# Altium PCB ATMEGA8-ATMEGA16(贴片).PcbDoc
Units mil, origin at the board's own origin, x right, y up, seen from the top; angles counter-clockwise.
Board outline 6000 x 4000 mil, 2 copper layers (Top Layer, Bottom Layer); 2 components, 39 nets, 72 pads, 17 vias.
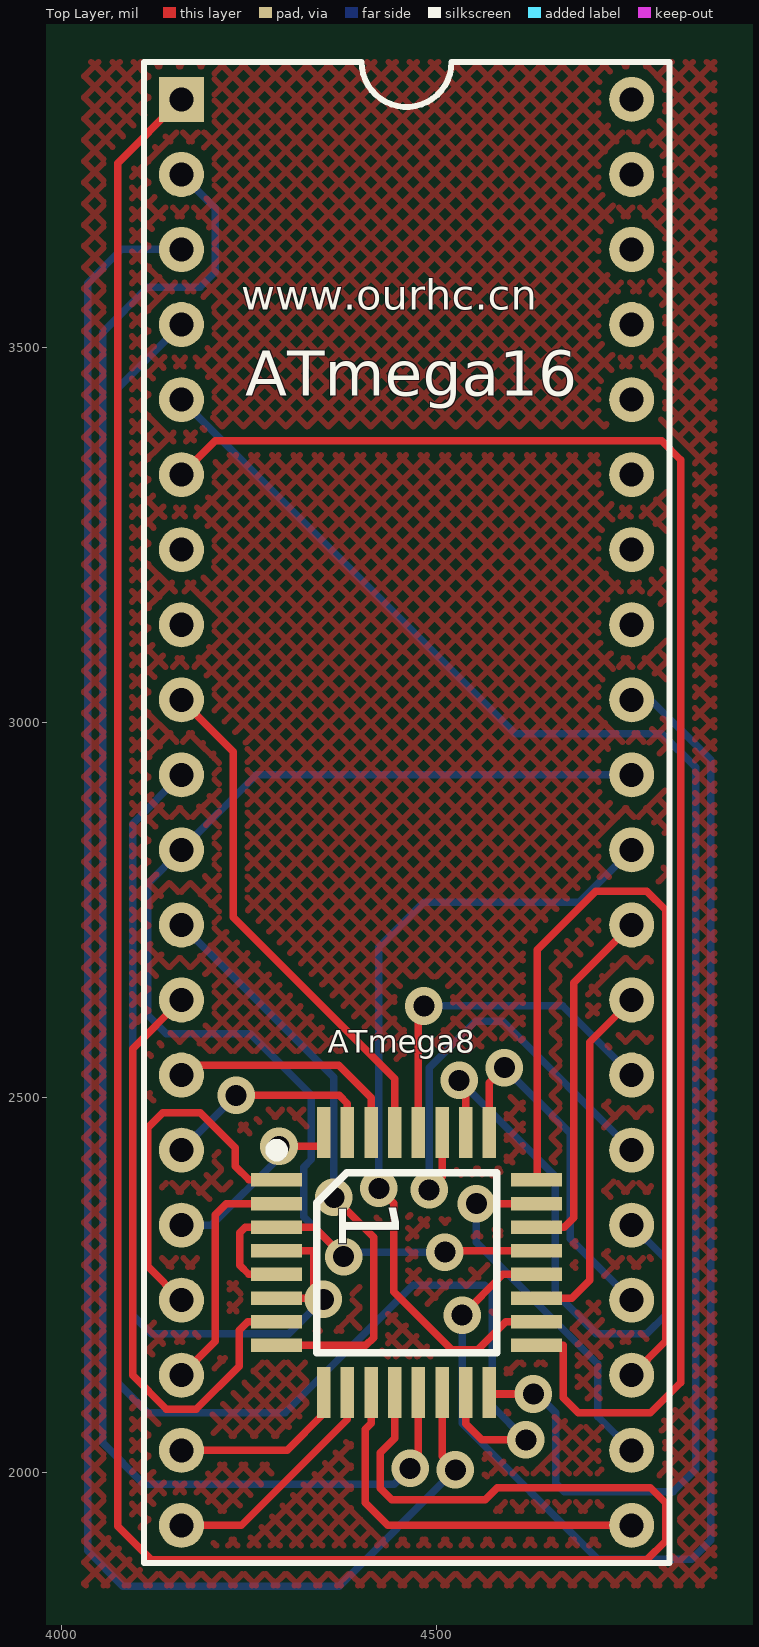
[diagram p0: Top Layer view]
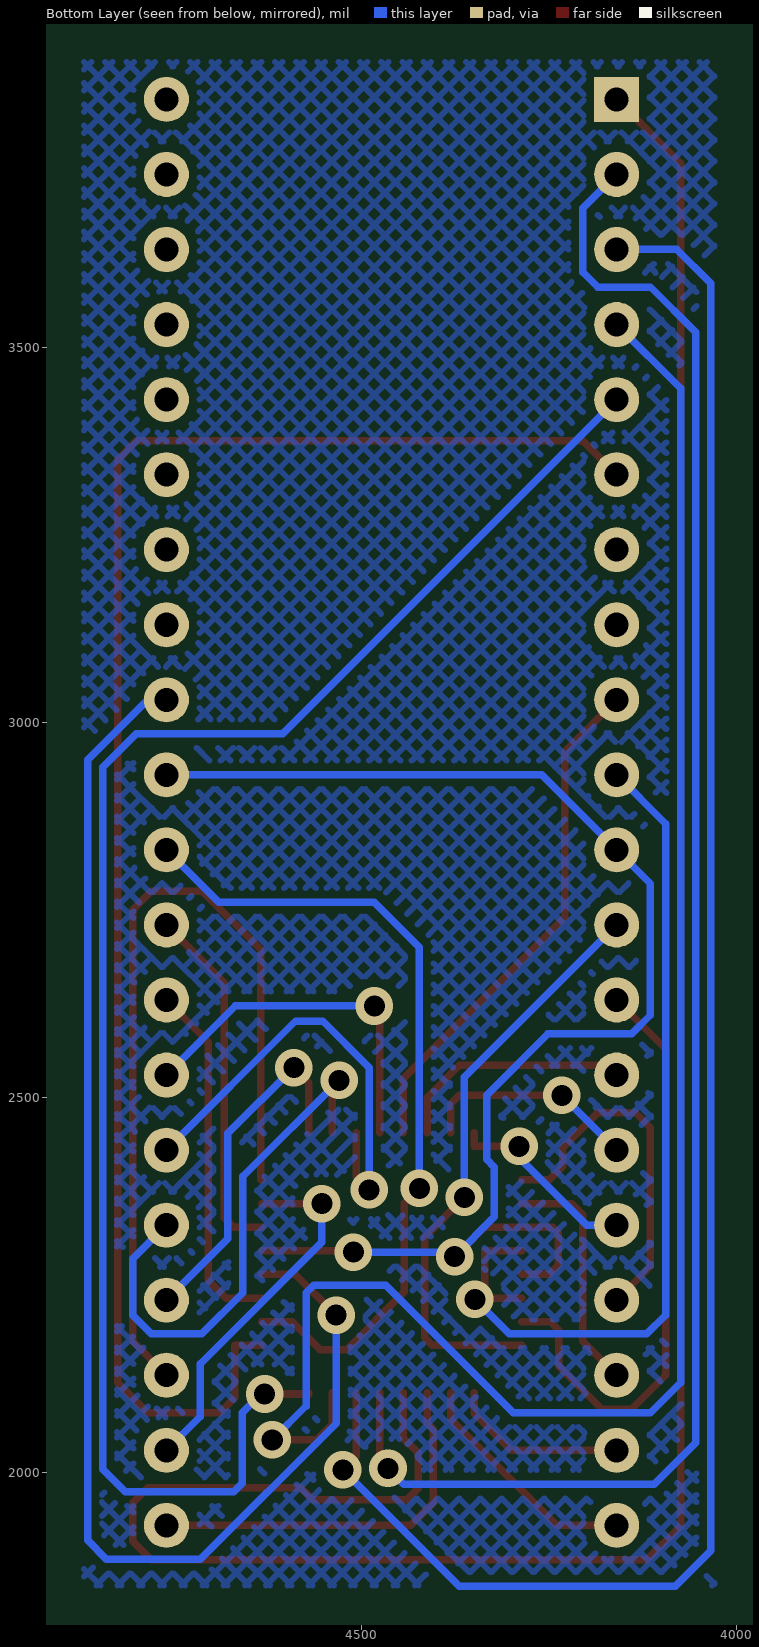
[diagram p1: Bottom Layer view, seen from below]

## Layer stack, top to bottom
Top Layer: signal copper 1.4
Dielectric: dielectric 12.6, FR-4, Dk 4.8
Bottom Layer: signal copper 1.4

## Board outline
1000,1000 7000,1000 7000,5000 1000,5000

## Design rules (kind name [scope] priority, off if disabled: settings)
Clearance [All] p1: gap=10
ComponentClearance [All] p1: gap=10 collisioncheckmode=3 verticalgap=10
PolygonConnect [All] p1: connectstyle=Relief reliefconductorwidth=10 reliefentries=4 polygonreliefangle="90 Angle"
RoutingVias [All] p1: holewidth=28 width=50 viastyle="Through Hole" minholewidth=28 minwidth=50 maxholewidth=28 maxwidth=50
SolderMaskExpansion [All] p1: expansion=4
TestPointUsage [All] p1: valid=0 allowmultiple=FALSE
Testpoint [All] p1: side=15 testpointundercomponent=TRUE minsize=40 maxsize=100 preferedsize=60 minholesize=0 maxholesize=40 preferedholesize=32 testpointgrid=1 style=1023 order=0123456789
Width [All] p1: maxlimit=10 minlimit=10 preferedwidth=10
17 further rules are at their usual default settings.

## Components (designator, comment, footprint, x,y, rotation, side; value= is the part's Value field where it differs from the comment)
ATmega8 "ATmega8-16AI" TQFP-32_0.8/7×7mm 4460,2280 r0 top
ATmega16 "ATmega16-16PI" 底座DIP-40/引脚15.24mm 4460,2880 r270 top (schematic designator ATmega16-)

## Footprints (in the part's own frame and the unit in brackets; to place one, negate y for a bottom-side part, rotate by r counter-clockwise, add the part's x,y. Pads: shape width x height; smd on the part's side, far side on the other; paste and mask are expansions set on the pad)
TQFP-32_0.8/7×7mm [mil] "引脚间距：0.8mm，长度 ：1mm 。主体外形 7×7mm，方形，边角索引"
  rect 68x18 smd: 1(-173.23,110.24) 2(-173.23,78.74) 3(-173.23,47.24) 4(-173.23,15.75) 5(-173.23,-15.75) 6(-173.23,-47.24) 7(-173.23,-78.74) 8(-173.23,-110.24) 17(173.23,-110.24) 18(173.23,-78.74) 19(173.23,-47.24) 20(173.23,-15.75) 21(173.23,15.75) 22(173.23,47.24) 23(173.23,78.74) 24(173.23,110.24)
  rect 18x68 smd: 9(-110.24,-173.23) 10(-78.74,-173.23) 11(-47.24,-173.23) 12(-15.75,-173.23) 13(15.75,-173.23) 14(47.24,-173.23) 15(78.74,-173.23) 16(110.24,-173.23) 25(110.24,173.23) 26(78.74,173.23) 27(47.24,173.23) 28(15.75,173.23) 29(-15.75,173.23) 30(-47.24,173.23) 31(-78.74,173.23) 32(-110.24,173.23)
  silkscreen extent -178,-120 120,155
底座DIP-40/引脚15.24mm [mil] "引脚跨度 ：600 Mil ，主体外形 17.8×50.8mm（700×2000Mil）"
  rect 60x60 hole 32: 1(-950,-300)
  round 60 hole 32: 2(-850,-300) 3(-750,-300) 4(-650,-300) 5(-550,-300) 6(-450,-300) 7(-350,-300) 8(-250,-300) 9(-150,-300) 10(-50,-300) 11(50,-300) 12(150,-300) 13(250,-300) 14(350,-300) 15(450,-300) 16(550,-300) 17(650,-300) 18(750,-300) 19(850,-300) 20(950,-300) 21(950,300) 22(850,300) 23(750,300) 24(650,300) 25(550,300) 26(450,300) 27(350,300) 28(250,300) 29(150,300) 30(50,300) 31(-50,300) 32(-150,300) 33(-250,300) 34(-350,300) 35(-450,300) 36(-550,300) 37(-650,300) 38(-750,300) 39(-850,300) 40(-950,300)
  silkscreen extent -1000,-350 1000,350

## Part data
ATmega8: library part ATmega8-A, "8 位微处理器/32引脚"
ATmega16: library part ATmega16-P, "8 位微处理器/40引脚"

## Via types
v1: diameter 50, hole 28, Top Layer to Bottom Layer, 17 vias

## Nets (pads, with @x,y where several pads share a name; then routed paths per layer and width w, separated by ;. In a path a pad name is that pad's centre, name@x,y a point inside that pad or via, vN(x,y) a via of type N, cw(c..) or ccw(c..) an arc to the next point about the centre after c; other vN are vias at no path point)
AREF: ATmega8.20 ATmega16.32 | length 1860.3
  Top Layer w10: v1(4534,2210) 4588.25,2264.25 ATmega8.20
  Bottom Layer w10: v1(4534,2210) 4534,2065.7 4714.7,1885 4840,1885 4865,1910 4865,2950 4785,3030 ATmega16.32
AVCC: ATmega8.18 ATmega16.30 | length 1095.7
  Top Layer w10: v1(4423,2379) 4443,2359 4443,2241 4520,2164 4555,2164 4592.26,2201.26 ATmega8.18
  Bottom Layer w10: v1(4423,2379) 4423,2700 4483,2760 4690,2760 ATmega16.30
GND: ATmega8.3 ATmega8.5 ATmega8.21 ATmega16.11 ATmega16.31 | length 1903
  Top Layer w10: ATmega8.5 4250,2264.25 4237.77,2276.48 4237.77,2319.7 4245.31,2327.24 ATmega8.3 4336.76,2327.24 v1(4376,2288) ; v1(4510.99,2294.12) 4512.62,2295.75 ATmega8.21
  Bottom Layer w10: v1(4510.99,2294.12) 4376,2294.12 v1(4376,2288) 4323,2341 4323,2407.24 4333.29,2417.53 4333.29,2503.29 4251.57,2585 4140,2585 4115,2610 4115,2785 ATmega16.11 4260,2930 ATmega16.31
PA0: ATmega16.40
PA1: ATmega16.39
PA2: ATmega16.38
PA3: ATmega16.37
PA4: ATmega16.36
PA5: ATmega16.35
PA6: ATmega16.34
PA7: ATmega16.33
PB0: ATmega8.12 ATmega16.1 | length 3283.3
  Top Layer w10: ATmega16.1 4075,3745 4075,1929 4120,1884 4780,1884 4805,1909 4805,1960 4785,1980 4580.75,1980 4564.75,1964 4440,1964 4424.75,1979.25 4424.75,2026.5 4444.25,2046 ATmega8.12
PB1: ATmega8.13 ATmega16.2 | length 2358.3
  Top Layer w10: v1(4464.75,2006) 4475.75,2017 ATmega8.13
  Bottom Layer w10: ATmega16.2 4205,3685 4205,3600 4185,3580 4115,3580 4055,3520 4055,2040 4110,1985 4443.75,1985 v1(4464.75,2006)
PB2: ATmega8.14 ATmega16.3 | length 2516.4
  Top Layer w10: ATmega8.14 4507.24,2021.76 v1(4525,2004)
  Bottom Layer w10: ATmega16.3 4080,3630 4035,3585 4035,1896 4082,1849 4370,1849 v1(4525,2004)
PB3: ATmega8.15 ATmega16.4 | length 2380.6
  Top Layer w10: ATmega8.15 4538.74,2065.26 4560,2044 v1(4619,2044)
  Bottom Layer w10: ATmega16.4 4075,3445 4075,2120 4115,2080 4298,2080 4468,2250 4564,2250 4574,2240 4574,2089 v1(4619,2044)
PB4: ATmega8.16 ATmega16.5 | length 2220.8
  Top Layer w10: ATmega8.16 4570.24,2105 v1(4629,2105)
  Bottom Layer w10: ATmega16.5 4605,2985 4800,2985 4845,2940 4845,2005 4815,1975 4670,1975 4659,1986 4659,2080 4634,2105 v1(4629,2105)
PB5: ATmega8.17 ATmega16.6 | length 2210.4
  Top Layer w10: ATmega16.6 4205,3375 4800,3375 4825,3350 4825,2120 4785,2080 4689,2080 4669,2100 4669,2169.76 ATmega8.17
PB6: ATmega16.7
PB7: ATmega16.8
PC0: ATmega8.23 ATmega16.22 | length 494.7
  Top Layer w10: v1(4553,2358.74) ATmega8.23
  Bottom Layer w10: v1(4553,2358.74) 4553,2307 4715,2145 4715,2075 ATmega16.22
PC1: ATmega8.24 ATmega16.23 | length 1159.8
  Top Layer w10: ATmega8.24 4634,2390.24 4634,2697 4712,2775 4780,2775 4805,2750 4805,2175 ATmega16.23
PC2: ATmega8.25 ATmega16.24 | length 475.4
  Top Layer w10: ATmega8.25 4570.24,2520 v1(4590.24,2540)
  Bottom Layer w10: v1(4590.24,2540) 4678,2452.24 4678,2312 ATmega16.24
PC3: ATmega8.26 ATmega16.25 | length 728.2
  Top Layer w10: v1(4530,2523) 4538.74,2514.26 ATmega8.26
  Bottom Layer w10: v1(4530,2523) 4658,2395 4658,2240 4713,2185 4780,2185 4805,2210 4805,2285 ATmega16.25
PC4: ATmega8.27 ATmega16.26 | length 613.3
  Top Layer w10: v1(4490,2377) 4507.24,2394.24 ATmega8.27
  Bottom Layer w10: v1(4490,2377) 4490,2540 4552,2602 4588,2602 ATmega16.26
PC5: ATmega8.28 ATmega16.27 | length 486.9
  Top Layer w10: ATmega8.28 4475.75,2614.75 v1(4483,2622)
  Bottom Layer w10: v1(4483,2622) 4668,2622 ATmega16.27
PC6: ATmega8.19 ATmega16.28 | length 477.2
  Top Layer w10: ATmega8.19 4680,2232.76 4704,2256.76 4704,2574 ATmega16.28
PC7: ATmega8.22 ATmega16.29 | length 477
  Top Layer w10: ATmega8.22 4670.24,2327.24 4683,2340 4683,2653 ATmega16.29
PD0: ATmega8.30 ATmega16.14 | length 322.7
  Top Layer w10: ATmega16.14 4173,2543 4369.76,2543 4412.76,2500 ATmega8.30
PD1: ATmega8.31 ATmega16.15 | length 294.7
  Top Layer w10: v1(4233,2503) 4370,2503 4381.26,2491.74 ATmega8.31
  Bottom Layer w10: ATmega16.15 v1(4233,2503)
PD2: ATmega8.32 ATmega16.16 | length 260.3
  Top Layer w10: v1(4290,2435) 4349.76,2435 ATmega8.32
  Bottom Layer w10: ATmega16.16 4200,2330 4290,2420 v1(4290,2435)
PD3: ATmega8.1 ATmega16.17 | length 480.4
  Top Layer w10: ATmega16.17 4115,2275 4115,2460 4135,2480 4185,2480 4232,2433 4232,2408.24 4250,2390.24 ATmega8.1
PD4: ATmega8.2 ATmega16.18 | length 320.4
  Top Layer w10: ATmega16.18 4205,2175 4205,2343.74 4220,2358.74 ATmega8.2
PD5: ATmega8.9 ATmega16.19 | length 237.8
  Top Layer w10: ATmega16.19 4300.76,2030 4349.76,2079 ATmega8.9
PD6: ATmega8.10 ATmega16.20 | length 315.3
  Top Layer w10: ATmega16.20 4240,1930 4381.26,2071.26 ATmega8.10
PD7: ATmega8.11 ATmega16.21 | length 517.8
  Top Layer w10: ATmega8.11 4412.76,2066 4404.75,2058 4404.75,1960 4434.75,1930 ATmega16.21
RESET: ATmega8.29 ATmega16.9 | length 694.5
  Top Layer w10: ATmega16.9 4229,2961 4229,2740.25 4444.25,2525 ATmega8.29
VCC: ATmega8.4 ATmega8.6 ATmega16.10 | length 1210.2
  Top Layer w10: ATmega8.6 4336,2232.76 v1@4336,2244 ; ATmega8.4 4336,2295.75 v1@4336,2244 ; v1(4349,2231) v1@4336,2244
  Bottom Layer w10: ATmega16.10 4095,2865 4095,2210 4120,2185 4303,2185 v1(4349,2231)
XTAL1: ATmega8.7 ATmega16.13 | length 813.6
  Top Layer w10: ATmega16.13 4095,2565 4095,2130 4140,2085 4180,2085 4237,2142 4237,2190 4248.26,2201.26 ATmega8.7
XTAL2: ATmega8.8 ATmega16.12 | length 789.5
  Top Layer w10: ATmega8.8 4405.76,2169.76 4416,2180 4416,2314 v1(4363,2367)
  Bottom Layer w10: ATmega16.12 4363,2527 v1(4363,2367)

## Polygon pours and split planes (outlines as drawn)
no net on Top Layer (hatched 45Degree grid 20 track 8): 4870,1850 4030,1850 4030,3880 4870,3880
no net on Bottom Layer (hatched 45Degree grid 20 track 8): 4870,1850 4030,1850 4030,3880 4870,3880

## Silkscreen, mask and mechanical layers (free items; w line width, h text height)
Top Overlay:
  text "www.ourhc.cn" at 4240,3550 h40.31
Mechanical 1:
  lines w10: 4015,1835 4885,1835 4885,3895 4015,3895 4015,1835

## Text inside footprints (layer, text, board x,y; h text height)
ATmega8: Top Overlay "1" at 4370,2365 h80 r270